# EAGLE board Esp32IoAdapt (EAGLE 9.6.2)
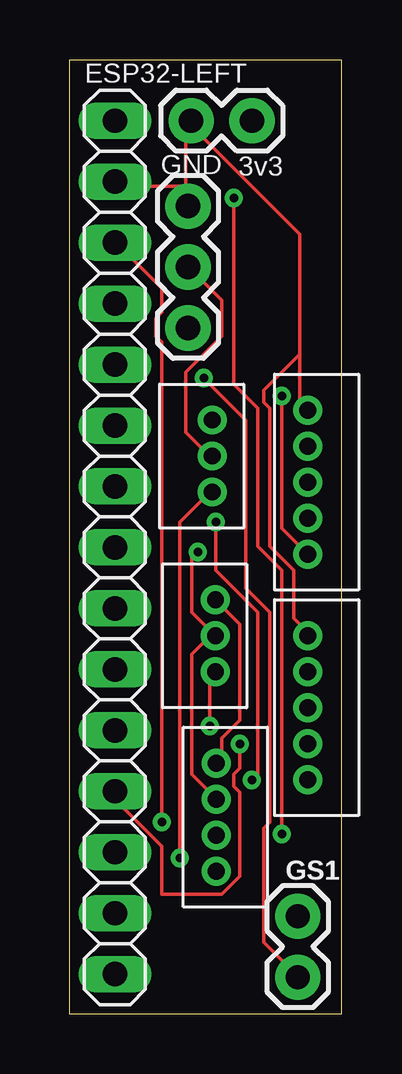
[diagram p0: board, top side]
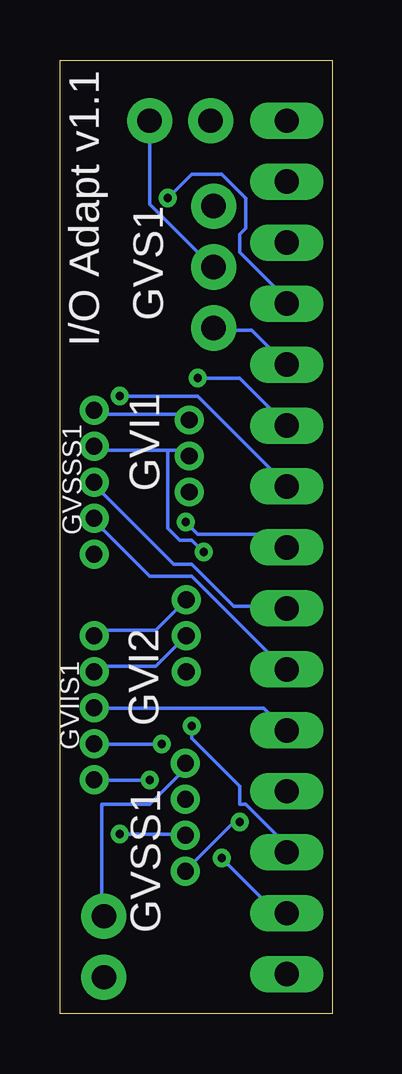
[diagram p1: board, bottom side, seen from below]

Size 11.35 x 39.74 mm. Coordinates in mm from the lower left corner, seen from the top.
Outline: 0,0 11.35,0 11.35,39.74 0,39.74 0,0
Copper layers (1*16): Top 0.035mm / dielectric 1.5mm / Bottom 0.035mm
Design rules "default": minimum track width 6mil, minimum drill 0.35mm, track to track 6mil, track to pad 6mil, pad to pad 6mil, via to via 6mil, smd to smd 6mil, copper to edge 40mil, drill to drill 6mil, minimum pad ring 10mil, minimum via ring 8mil, stop-mask expansion 4mil, vias tented up to drill 0mil, thermal gap 10mil

## Footprints (pad centres in the part's own frame; a part is rotated, then mirrored left to right if it is on the bottom)
1X15 = drill 1.016 long: 1 -17.78,0; 2 -15.24,0; 3 -12.7,0; 4 -10.16,0; 5 -7.62,0; 6 -5.08,0; 7 -2.54,0; 8 0,0; 9 2.54,0; 10 5.08,0; 11 7.62,0; 12 10.16,0; 13 12.7,0; 14 15.24,0; 15 17.78,0
1X02 = drill 1.016 pad 1.88: 1 0,0; 2 2.54,0
B3B-ZR = drill 0.7 pad 1.1: 1 -1.5,0; 2 0,0; 3 1.5,0
B5B-ZR = drill 0.7: 1 7.5,-1.3; 2 6,-1.3; 3 4.5,-1.3; 4 3,-1.3; 5 1.5,-1.3
1X03 = drill 1.016 pad 1.88: 1 0,0; 2 2.54,0; 3 5.08,0
B4B-ZR = drill 0.7: 1 6,-1.3; 2 4.5,-1.3; 3 3,-1.3; 4 1.5,-1.3

## Placement (x,y rotation side)
ESP32-RIGHT  0  [1X15]  1.91,19.43 270 top
GS1  [1X02]  9.53,4.06 270 top
GVI1  B3B-ZR  [B3B-ZR]  5.97,23.24 270 top
GVI2  B3B-ZR  [B3B-ZR]  6.1,15.75 270 top
GVIIS1  B5B-ZR  [B5B-ZR]  8.64,8.26 90 top
GVS1  [1X03]  4.95,33.66 270 top
GVSS1  B4B-ZR  [B4B-ZR]  4.83,4.45 90 top
GVSSS1  B5B-ZR  [B5B-ZR]  8.64,17.65 90 top
PWR  [1X02]  5.08,37.21 0 top

## Library data of the parts
ESP32-RIGHT = pinhead
GS1 GVS1 PWR = SparkFun-Connectors
GVI1 GVI2 GVIIS1 GVSS1 GVSSS1 = jst

## Nets
3V3: GVI1.2 GVI2.2 GVIIS1.2 GVS1.2 GVSS1.2 GVSSS1.2 PWR.2
D12: ESP32-RIGHT.4 GVSS1.3
D13: ESP32-RIGHT.3 GVSS1.4
D14: ESP32-RIGHT.5 GVS1.3
D25: ESP32-RIGHT.8 GVIIS1.5
D26: ESP32-RIGHT.7 GVSSS1.5
D27: ESP32-RIGHT.6 GS1.2
D32: ESP32-RIGHT.10 GVSSS1.4
D33: ESP32-RIGHT.9 GVSSS1.3
GND: ESP32-RIGHT.2 GS1.1 GVI1.1 GVI2.1 GVIIS1.1 GVS1.1 GVSS1.1 GVSSS1.1 PWR.1
I34: ESP32-RIGHT.12 GVIIS1.4
I35: ESP32-RIGHT.11 GVIIS1.3
I36: ESP32-RIGHT.14 GVI1.3
I39: ESP32-RIGHT.13 GVI2.3
RESET: ESP32-RIGHT.15
VIN: ESP32-RIGHT.1

## Tracks (layer width: path | path; a pad name or v marks a point on that pad's centre or on a via)
3V3  (via drill 0.35)
  Top 0.152: GVSS1.2 6.12,8.99 5.12,9.99 5.12,14.99 5.87,15.74 GVI2.2 5.87,15.99 5.12,16.74 5.12,18.99 v5.37,19.24 | GVI1.2 5.87,23.24 4.87,24.24 4.87,26.74 6.37,28.24 6.37,29.74 5.12,30.99 GVS1.2
  Bottom 0.152: GVI2.2 6.12,15.74 7.37,14.49 9.87,14.49 GVIIS1.2 | 6.87,23.49 9.87,23.49 GVSSS1.2 | 6.87,23.49 6.37,23.49 6.12,23.24 GVI1.2 | GVS1.2 5.12,31.24 7.62,33.74 7.62,36.99 PWR.2 | v5.37,19.24 5.87,19.74 6.37,19.74 6.87,20.24 6.87,23.49
D12  (via drill 0.35)
  Top 0.152: v8.87,7.49 8.87,18.49 7.87,19.49 7.87,25.24 6.87,26.24 v6.87,33.99
  Bottom 0.152: v8.87,7.49 6.37,7.49 GVSS1.3 | v6.87,33.99 5.87,34.99 4.62,34.99 3.62,33.99 3.62,32.74 3.87,32.49 3.87,31.74 1.86,29.74 ESP32-RIGHT.4
D13  (via drill 0.35)
  Top 0.152: v3.87,7.99 3.87,27.99 3.62,28.24 3.62,28.99 3.87,29.24 3.87,30.24 2.12,31.99 ESP32-RIGHT.3
  Bottom 0.152: v3.87,7.99 4.12,7.99 6.12,5.99 GVSS1.4
D14
  Bottom 0.152: ESP32-RIGHT.5 2.12,27.24 3.37,28.49 4.87,28.49 GVS1.3
D25  (via drill 0.35)
  Top 0.152: v7.62,9.74 7.87,9.99 7.87,16.74 6.12,18.49 v6.12,20.49
  Bottom 0.152: v7.62,9.74 9.87,9.74 GVIIS1.5 | v6.12,20.49 5.62,19.99 2.62,19.99 2.12,19.49 ESP32-RIGHT.8
D26  (via drill 0.35)
  Top 0.152: v8.87,25.74 8.87,20.24 9.87,19.24 GVSSS1.5
  Bottom 0.152: v8.87,25.74 5.62,25.74 1.86,21.99 ESP32-RIGHT.7
D27  (via drill 0.35)
  Top 0.152: v5.62,26.49 7.37,24.74 7.37,17.74 8.37,16.74 8.37,7.99 8.12,7.74 8.12,2.99 9.37,1.74 GS1.2
  Bottom 0.152: v5.62,26.49 3.87,26.49 2.12,24.74 ESP32-RIGHT.6
D32
  Bottom 0.152: GVSSS1.4 9.87,20.49 7.62,18.24 5.87,18.24 2.12,14.49 ESP32-RIGHT.10
D33
  Bottom 0.152: GVSSS1.3 9.87,21.99 6.62,18.74 5.87,18.74 4.12,16.99 2.12,16.99 ESP32-RIGHT.9
GND
  Top 0.152: GVSS1.1 6.37,10.49 6.37,11.49 7.12,12.24 7.12,16.24 6.12,17.24 GVI2.1 | 4.87,34.49 2.12,34.49 ESP32-RIGHT.2 | 4.87,34.49 4.87,33.74 GVS1.1 4.87,34.49 | 4.87,34.49 4.87,36.99 PWR.1 5.12,36.99 9.62,32.49 9.62,27.49 | 9.62,27.49 9.62,25.49 9.87,25.24 GVSSS1.1 | 9.62,27.49 8.12,25.99 8.12,25.49 8.37,25.24 8.37,19.49 9.37,18.49 9.37,16.49 9.87,15.99 GVIIS1.1
  Bottom 0.152: GVI2.1 6.12,17.24 7.37,15.99 9.87,15.99 GVIIS1.1 | GS1.1 9.62,4.24 9.62,8.74 7.62,8.74 6.12,10.24 GVSS1.1 | GVI1.1 6.12,24.74 6.37,24.99 9.87,24.99 GVSSS1.1
I34  (via drill 0.35)
  Top 0.152: v7.12,11.24 7.12,10.24 6.87,9.99 6.87,9.49 7.12,9.24 7.12,5.74 6.37,4.99 3.87,4.99 3.87,6.99 2.12,8.74 2.12,9.24 ESP32-RIGHT.12
  Bottom 0.152: v7.12,11.24 9.87,11.24 GVIIS1.4
I35
  Bottom 0.152: GVIIS1.3 9.87,12.74 2.87,12.74 2.12,11.99 ESP32-RIGHT.11
I36  (via drill 0.35)
  Top 0.152: v4.62,6.49 4.62,20.49 5.87,21.74 GVI1.3
  Bottom 0.152: v4.62,6.49 2.37,4.24 2.12,4.24 ESP32-RIGHT.14
I39  (via drill 0.35)
  Top 0.152: v5.87,11.99 5.87,14.24 GVI2.3
  Bottom 0.152: v5.87,11.99 5.87,11.49 3.87,9.49 3.87,8.74 3.62,8.74 2.12,7.24 2.12,6.74 ESP32-RIGHT.13

## Text on the board
tNames: ESP32-LEFT | GND | 3v3
bNames: I/O Adapt v1.1 | GVS1